# EAGLE board imix (EAGLE 7.5.0), part 1 of 2
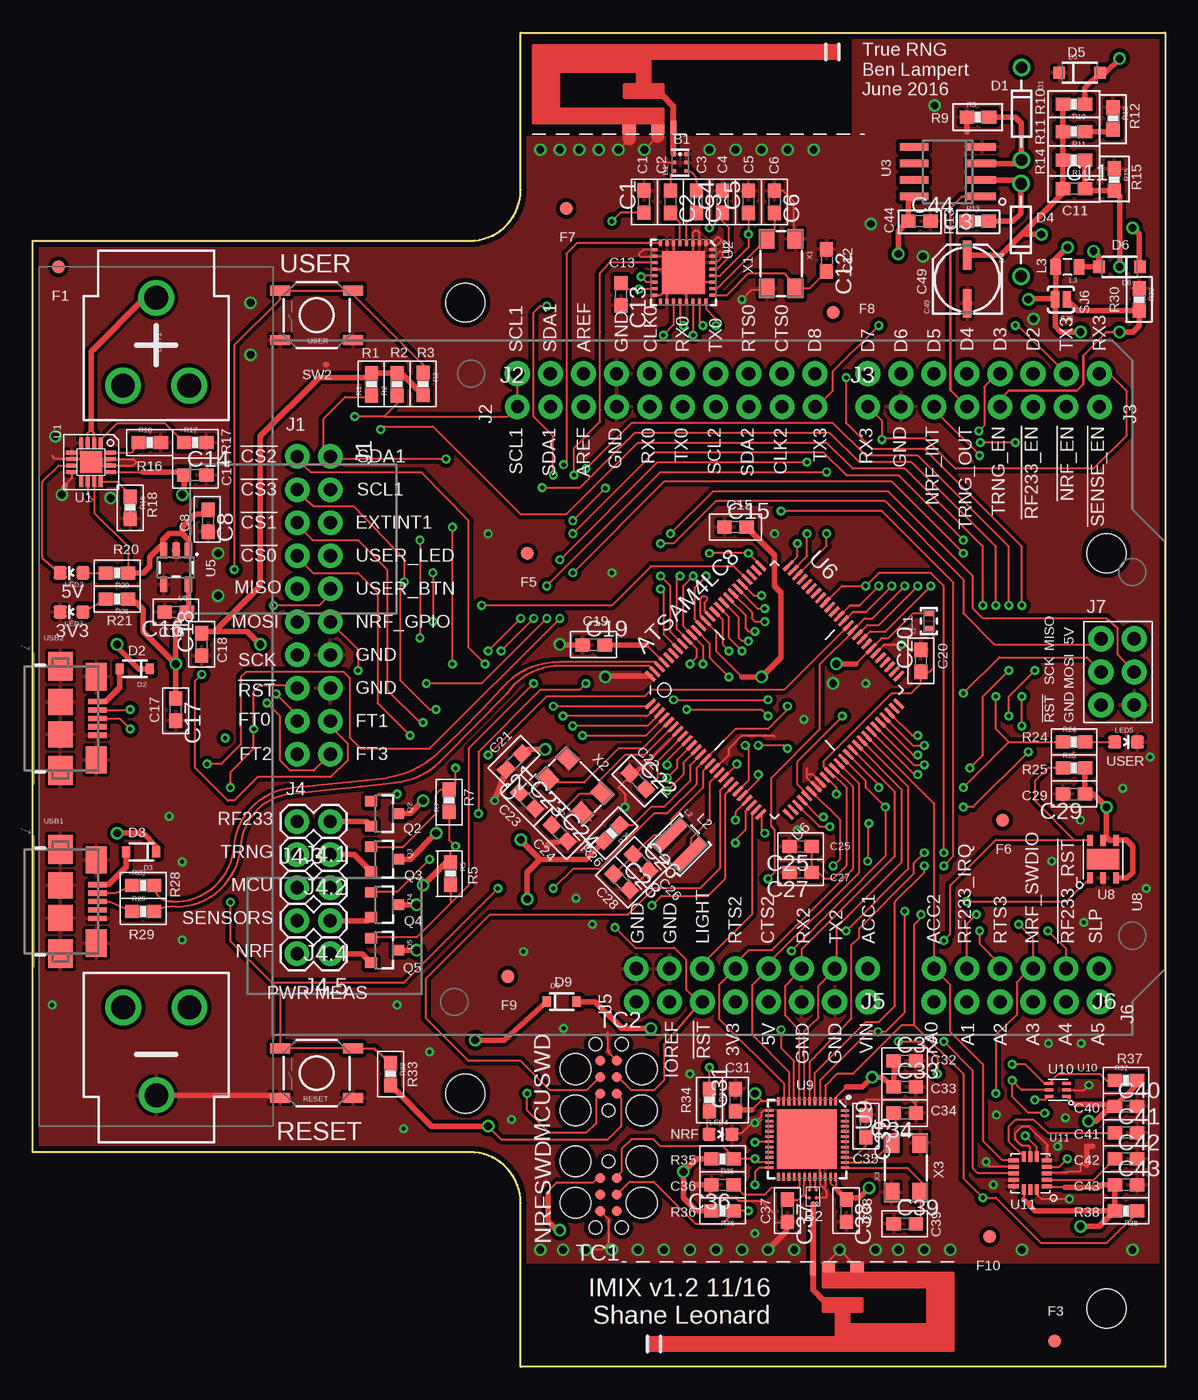
[diagram p0: board, top side]
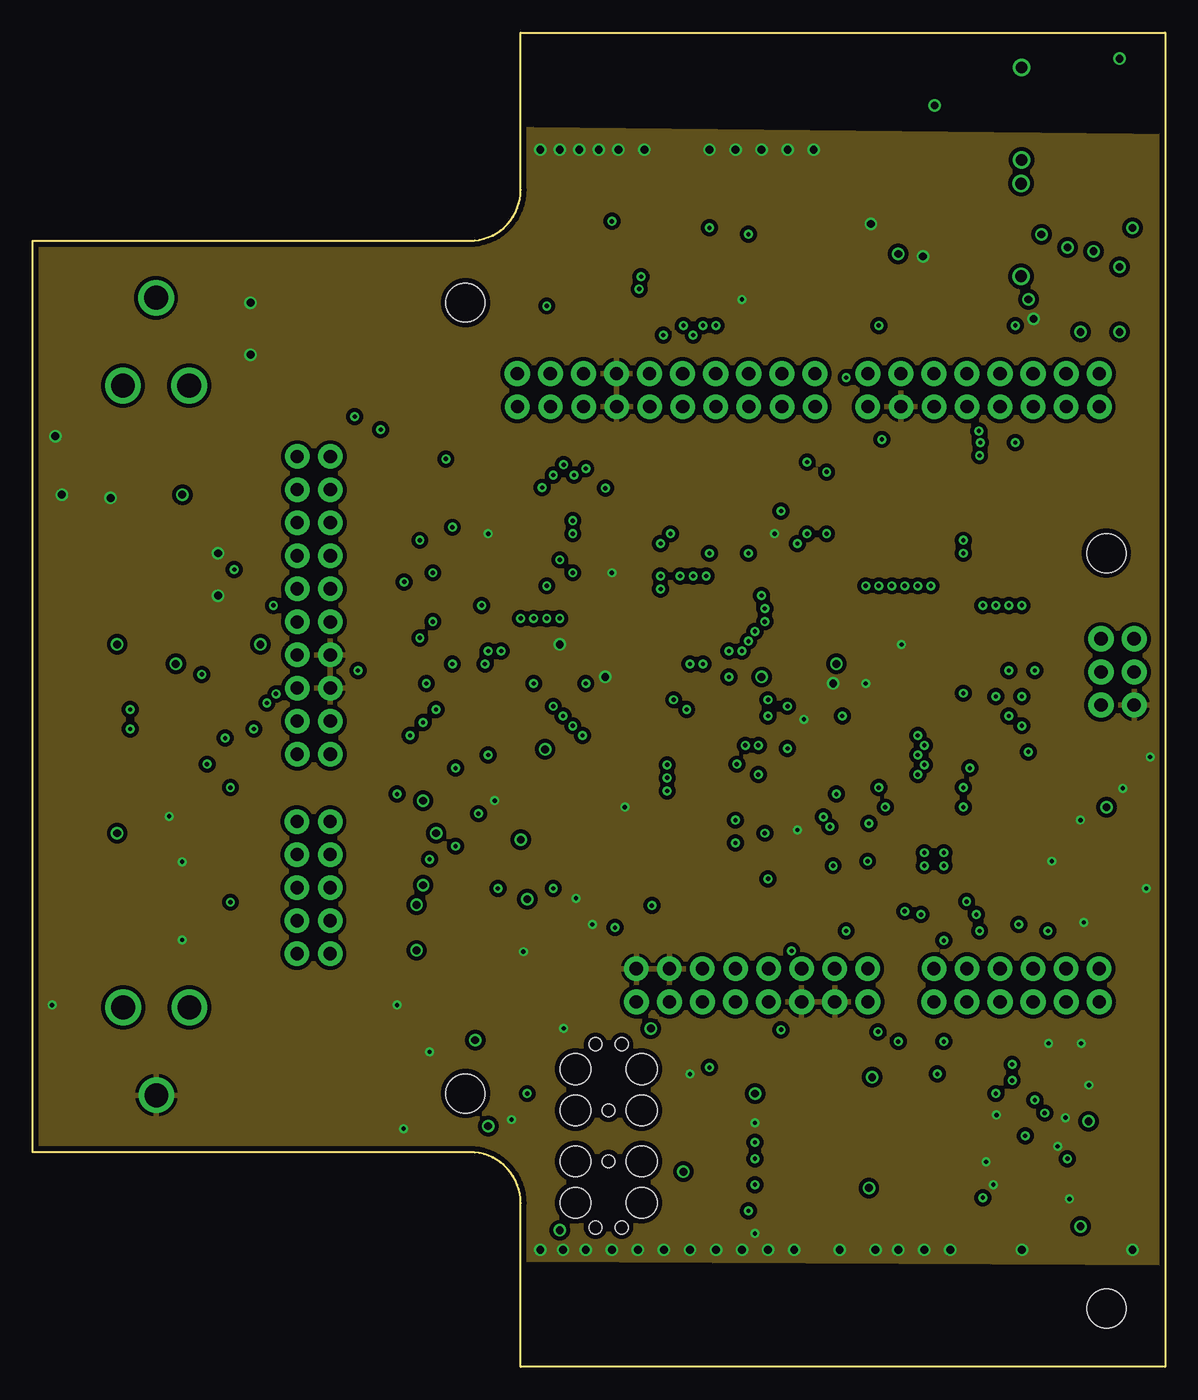
[diagram p1: board, inner layer Route2]
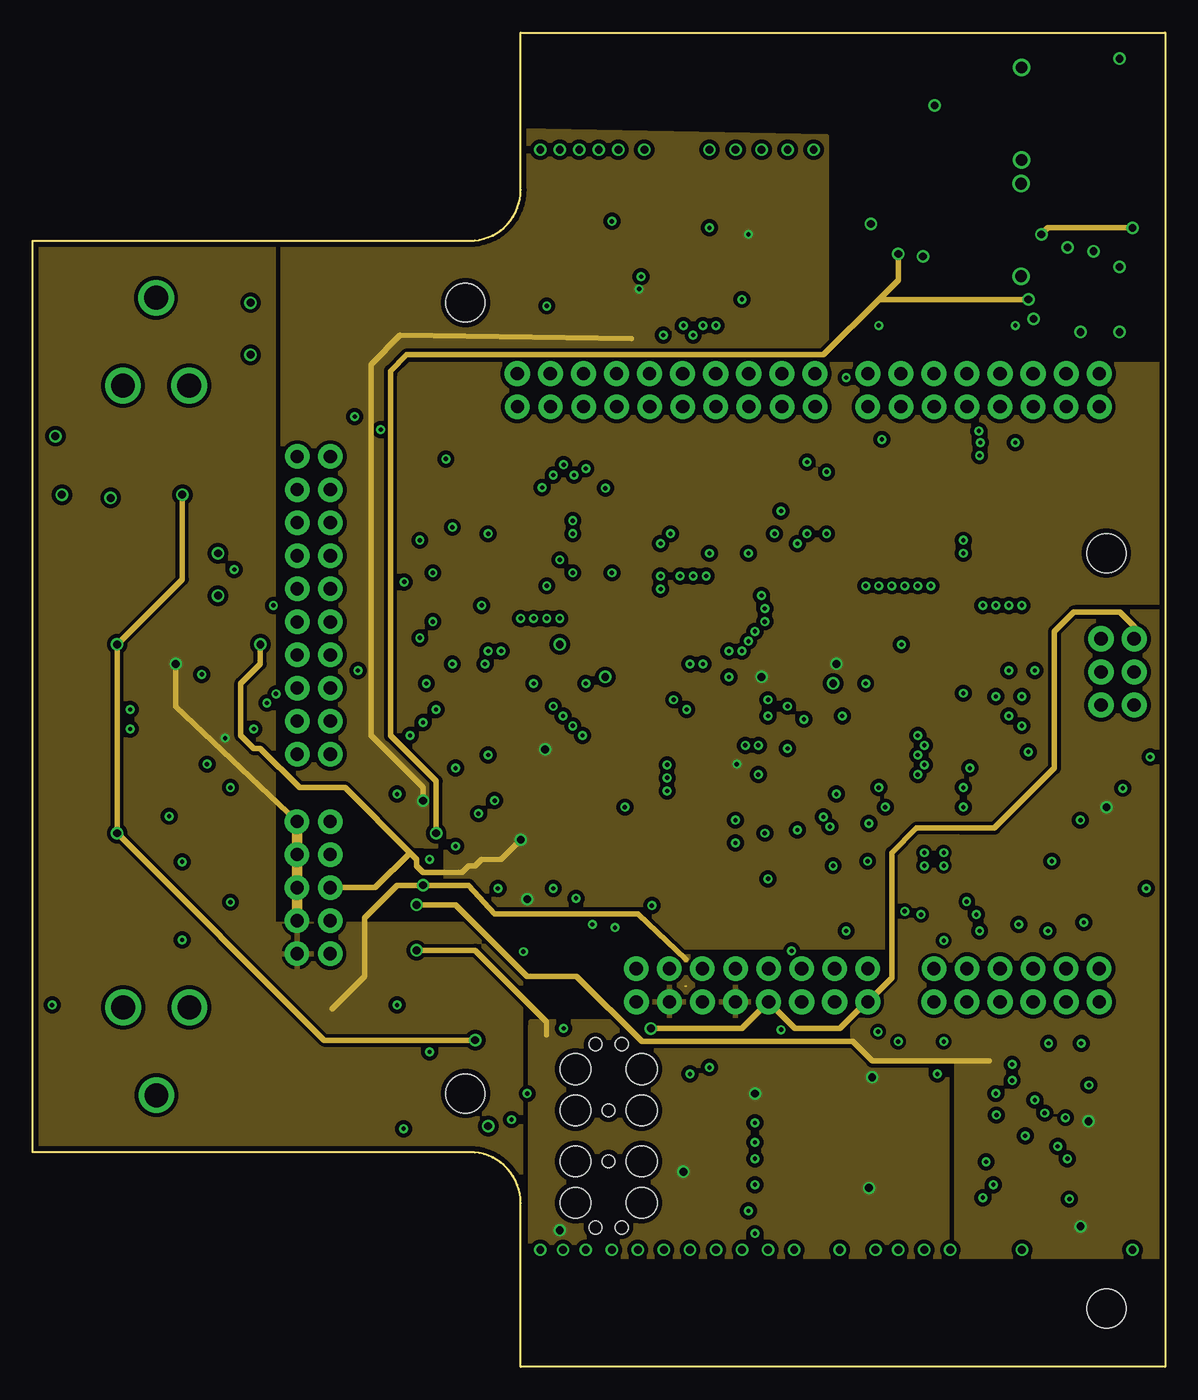
[diagram p2: board, inner layer Route15]
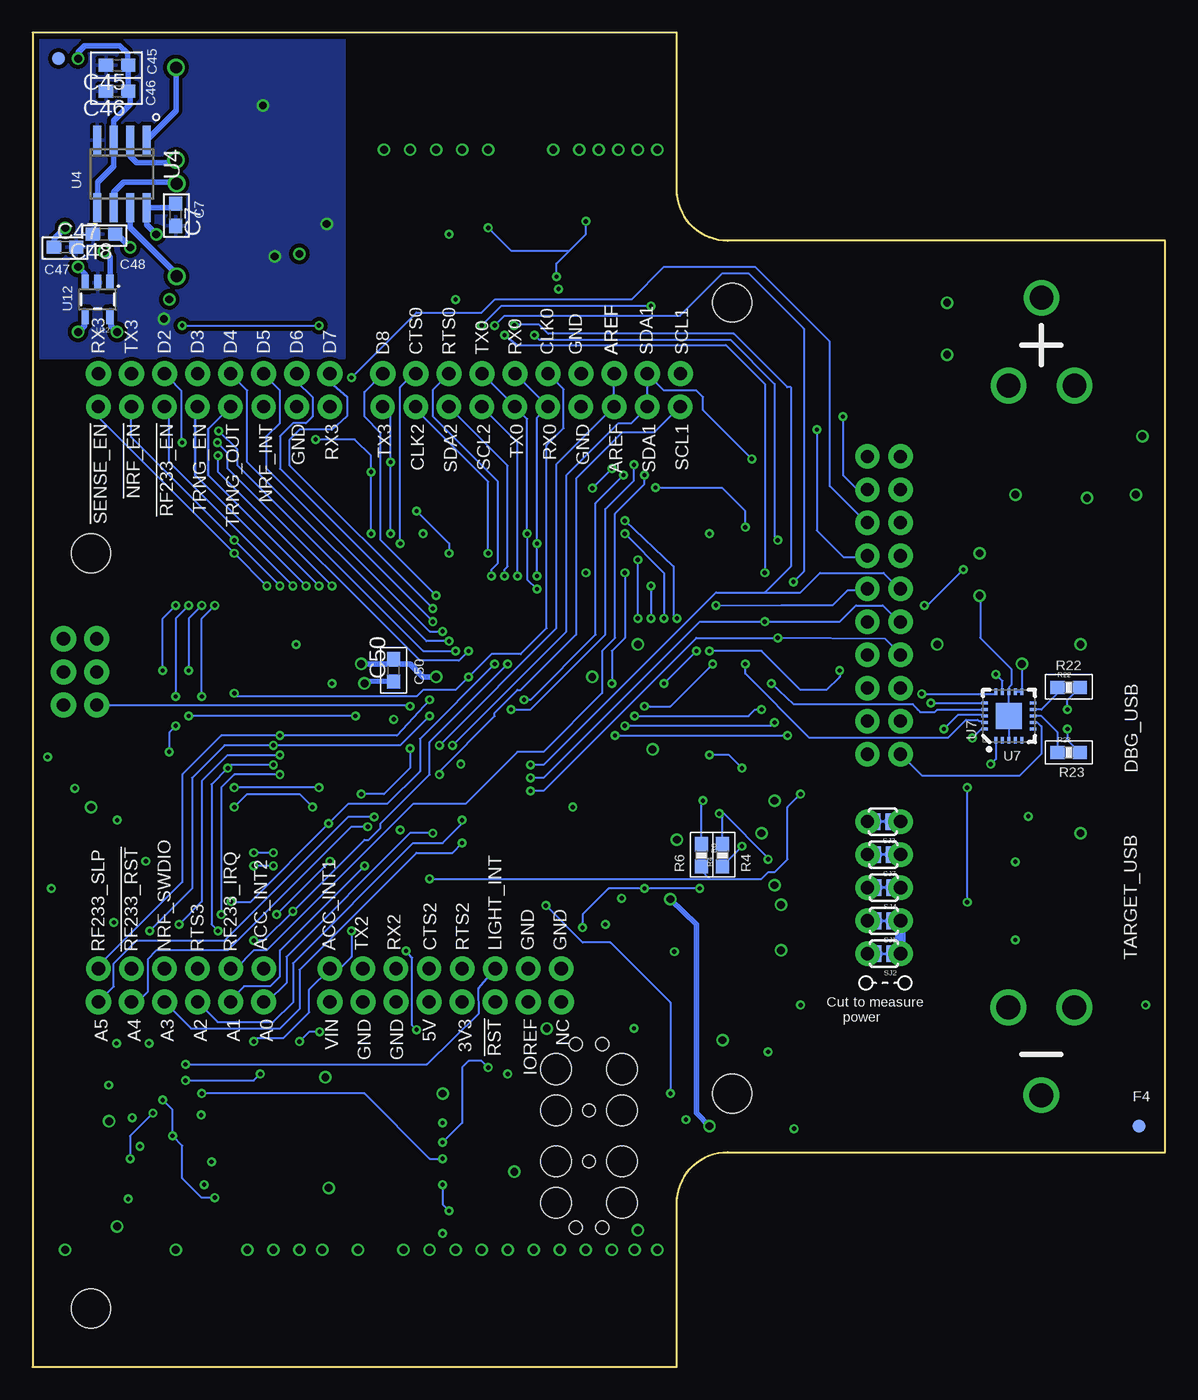
[diagram p3: board, bottom side, seen from below]

Size 87 x 102.5 mm. Coordinates in mm from the lower left corner, seen from the top.
Outline: 0,16.5 0,86.5 33.59,86.5 arc90 37.5,90.41 37.5,102.5 87,102.5 87,0 37.5,0 37.5,12.6 arc90 33.59,16.5 0,16.5
Copper layers (1+2*15+16): Top 0.0356mm / dielectric 9mil / Route2 0.0356mm / dielectric 40mil / Route15 0.0356mm / dielectric 9mil / Bottom 0.0356mm
Design rules "oshpark-2layer *": minimum track width 6mil, minimum drill 13mil, track to track 6mil, track to pad 6mil, pad to pad 6mil, via to via 6mil, smd to smd 6mil, copper to edge 15mil, drill to drill 6mil, minimum pad ring 7mil, minimum via ring 7mil, stop-mask expansion 2.5mil, vias tented up to drill 13mil, thermal gap 10mil
Net classes: 0 default: width 0.152 mm, drill 0.33 mm, clearance 0.152 mm; 1 power: width 0.152 mm, drill 0.33 mm, clearance 0.254 mm; 2 50ohm: width 0.152 mm, drill 0.33 mm, clearance 0.254 mm
Holes 3 mm at 33.25,81.75 33.25,21 82.5,4.5 82.5,62.5

## Footprints (pad centres in the part's own frame; a part is rotated, then mirrored left to right if it is on the bottom)
BALUN0805 = smd 0.3 x 0.3: 1 1.65,1.1; 2 1,1.1; 3 0.35,1.1; 4 0.35,0.15; 5 1,0.15; 6 1.65,0.15
BAL_NRF01D3 = smd 0.264 x 0.264: DIFF@1 0.219,0.25; DIFF@2 0.219,0.75; GND 0.819,0.75; SE 1.252,0.5; VCC 0.819,0.25
BATTERY_18650-HOLDER = drill 1.829: GND@1 30.628,0.01; GND@2 23.88,2.55; GND@3 23.88,-2.53; PWR@1 -30.628,-0.01; PWR@2 -23.88,2.53; PWR@3 -23.88,-2.55
C0603 = smd 1.1 x 1: 1 -0.85,0; 2 0.85,0
PANASONIC_C = smd 2.2 x 0.65: + 1.9,-0.2; - -1.8,-0.2
DIODE-ZENER = drill 0.9: P$1 -3.556,0; P$2 3.556,0
SOD-323 = smd 0.63 x 0.83: A 1.15,0; C -1.15,0
SOD-123 = smd 0.9 x 0.95: A 1.575,0; C -1.575,0
FIDUCIAL = smd 1 x 1: P$1 0,0
2X10_ROUND_NOSILK = drill 1.016 pad 1.88: 1 -11.43,-1.27; 2 -11.43,1.27; 3 -8.89,-1.27; 4 -8.89,1.27; 5 -6.35,-1.27; 6 -6.35,1.27; 7 -3.81,-1.27; 8 -3.81,1.27; 9 -1.27,-1.27; 10 -1.27,1.27; 11 1.27,-1.27; 12 1.27,1.27; 13 3.81,-1.27; 14 3.81,1.27; 15 6.35,-1.27; 16 6.35,1.27; 17 8.89,-1.27; 18 8.89,1.27; 19 11.43,-1.27; 20 11.43,1.27
1X10_NO_SILK = drill 1.016 pad 1.88: 1 0,0; 2 2.54,0; 3 5.08,0; 4 7.62,0; 5 10.16,0; 6 12.7,0; 7 15.24,0; 8 17.78,0; 9 20.32,0; 10 22.86,0
ARDUINO_R3_NO_HOLES = drill 1.016 pad 1.93: 3.3V 35.56,2.54; 5V 38.1,2.54; A0 50.8,2.54; A1 53.34,2.54; A2 55.88,2.54; A3 58.42,2.54; A4 60.96,2.54; A5 63.5,2.54; AREF 23.876,50.8; D0 63.5,50.8; D1 60.96,50.8; D2 58.42,50.8; D3 55.88,50.8; D4 53.34,50.8; D5 50.8,50.8; D6 48.26,50.8; D7 45.72,50.8; D8 41.656,50.8; D9 39.116,50.8; D10 36.576,50.8; D11 34.036,50.8; D12 31.496,50.8; D13 28.956,50.8; GND@1 40.64,2.54; GND@2 43.18,2.54; GND@3 26.416,50.8; GND@4 66.18,25.35; IOREF 30.48,2.54; MISO 63.64,30.43; MOSI 66.18,27.89; NC 27.94,2.54; RESET@1 33.02,2.54; RESET@2 63.64,25.35; SCK 63.64,27.89; SCL 18.796,50.8; SDA 21.336,50.8; VCC 66.18,30.43; VIN 45.72,2.54
1X08_NO_SILK = drill 1.016 pad 1.88: 1 0,0; 2 2.54,0; 3 5.08,0; 4 7.62,0; 5 10.16,0; 6 12.7,0; 7 15.24,0; 8 17.78,0
1X02 = drill 1.016 pad 1.88: 1 0,0; 2 2.54,0
1X06_NO_SILK = drill 1.016 pad 1.88: 1 0,0; 2 2.54,0; 3 5.08,0; 4 7.62,0; 5 10.16,0; 6 12.7,0
L0603 = smd 0.4 x 0.8: 1 0.2,0.4; 2 1.4,0.4
L1212 = smd 0.9 x 3: 1 -1.05,0; 2 1.05,0
0805 = smd 0.8 x 1.2: 1 -0.9,0; 2 0.9,0
LED-0603 = smd 1 x 1: A 0,-0.877; C 0,0.877
SOT23-3 = smd 0.8 x 0.9: 1 -0.95,-1; 2 0.95,-1; 3 0,1.1
0603-RES = smd 1.1 x 1: 1 -0.85,0; 2 0.85,0
TACTILE-SWITCH-SMD = smd 1.524 x 0.762: 1 -2.794,1.905; 2 2.794,1.905; 3 -2.794,-1.905; 4 2.794,-1.905
PAD-JUMPER-2-NC_BY_TRACE_YES_SILK = smd 0.635 x 1.27: 1 -0.508,0; 2 0.508,0
SJ_2S-NO = smd 0.635 x 1.27: 1 -0.45,0; 2 0.45,0
TC2030-IDC = smd 0.787 x 0.787: 1 -1.27,-0.635; 2 -1.27,0.635; 3 0,-0.635; 4 0,0.635; 5 1.27,-0.635; 6 1.27,0.635 | hole 0.991: -2.54,0; 2.54,1.016; 2.54,-1.016 | hole 2.375: -2.54,2.54; -2.54,-2.54; 0.635,2.54; 0.635,-2.54
QFP16_3X3 = smd 0.85 x 0.3: 1 -1.475,0.75; 2 -1.475,0.25; 3 -1.475,-0.25; 4 -1.475,-0.75; 9 1.475,-0.75; 10 1.475,-0.25; 11 1.475,0.25; 12 1.475,0.75 | smd 0.3 x 0.85: 5 -0.75,-1.475; 6 -0.25,-1.475; 7 0.25,-1.475; 8 0.75,-1.475; 13 0.75,1.475; 14 0.25,1.475; 15 -0.25,1.475; 16 -0.75,1.475 | smd 1.7 x 1.7: PAD 0,0
32QN2 = smd 0.5 x 0.23: 1 -2.25,1.75; 2 -2.25,1.25; 3 -2.25,0.75; 4 -2.25,0.25; 5 -2.25,-0.25; 6 -2.25,-0.75; 7 -2.25,-1.25; 8 -2.25,-1.75; 17 2.25,-1.75; 18 2.25,-1.25; 19 2.25,-0.75; 20 2.25,-0.25; 21 2.25,0.25; 22 2.25,0.75; 23 2.25,1.25; 24 2.25,1.75 | smd 0.23 x 0.5: 9 -1.75,-2.25; 10 -1.25,-2.25; 11 -0.75,-2.25; 12 -0.25,-2.25; 13 0.25,-2.25; 14 0.75,-2.25; 15 1.25,-2.25; 16 1.75,-2.25; 25 1.75,2.25; 26 1.25,2.25; 27 0.75,2.25; 28 0.25,2.25; 29 -0.25,2.25; 30 -0.75,2.25; 31 -1.25,2.25; 32 -1.75,2.25 | smd 3.3 x 3.3: PADDLE 0,0
SO8 = smd 0.6 x 2.2: 1 -1.905,-2.6; 2 -0.635,-2.6; 3 0.635,-2.6; 4 1.905,-2.6; 5 1.905,2.6; 6 0.635,2.6; 7 -0.635,2.6; 8 -1.905,2.6
SOT23-5 = smd 0.55 x 1.2: 1 -0.95,-1.3; 2 0,-1.3; 3 0.95,-1.3; 4 0.95,1.3; 5 -0.95,1.3
TQFP100 = smd 1 x 0.25: 1 -7.5,6; 2 -7.5,5.5; 3 -7.5,5; 4 -7.5,4.5; 5 -7.5,4; 6 -7.5,3.5; 7 -7.5,3; 8 -7.5,2.5; 9 -7.5,2; 10 -7.5,1.5; 11 -7.5,1; 12 -7.5,0.5; 13 -7.5,0; 14 -7.5,-0.5; 15 -7.5,-1; 16 -7.5,-1.5; 17 -7.5,-2; 18 -7.5,-2.5; 19 -7.5,-3; 20 -7.5,-3.5; 21 -7.5,-4; 22 -7.5,-4.5; 23 -7.5,-5; 24 -7.5,-5.5; 25 -7.5,-6; 51 7.5,-6; 52 7.5,-5.5; 53 7.5,-5; 54 7.5,-4.5; 55 7.5,-4; 56 7.5,-3.5; 57 7.5,-3; 58 7.5,-2.5; 59 7.5,-2; 60 7.5,-1.5; 61 7.5,-1; 62 7.5,-0.5; 63 7.5,0; 64 7.5,0.5; 65 7.5,1; 66 7.5,1.5; 67 7.5,2; 68 7.5,2.5; 69 7.5,3; 70 7.5,3.5; 71 7.5,4; 72 7.5,4.5; 73 7.5,5; 74 7.5,5.5; 75 7.5,6 | smd 0.25 x 1: 26 -6,-7.5; 27 -5.5,-7.5; 28 -5,-7.5; 29 -4.5,-7.5; 30 -4,-7.5; 31 -3.5,-7.5; 32 -3,-7.5; 33 -2.5,-7.5; 34 -2,-7.5; 35 -1.5,-7.5; 36 -1,-7.5; 37 -0.5,-7.5; 38 0,-7.5; 39 0.5,-7.5; 40 1,-7.5; 41 1.5,-7.5; 42 2,-7.5; 43 2.5,-7.5; 44 3,-7.5; 45 3.5,-7.5; 46 4,-7.5; 47 4.5,-7.5; 48 5,-7.5; 49 5.5,-7.5; 50 6,-7.5; 76 6,7.5; 77 5.5,7.5; 78 5,7.5; 79 4.5,7.5; 80 4,7.5; 81 3.5,7.5; 82 3,7.5; 83 2.5,7.5; 84 2,7.5; 85 1.5,7.5; 86 1,7.5; 87 0.5,7.5; 88 0,7.5; 89 -0.5,7.5; 90 -1,7.5; 91 -1.5,7.5; 92 -2,7.5; 93 -2.5,7.5; 94 -3,7.5; 95 -3.5,7.5; 96 -4,7.5; 97 -4.5,7.5; 98 -5,7.5; 99 -5.5,7.5; 100 -6,7.5
QFN20 = smd 0.5 x 0.25: 1 -1.85,1; 2 -1.85,0.5; 3 -1.85,0; 4 -1.85,-0.5; 5 -1.85,-1; 11 1.85,-1; 12 1.85,-0.5; 13 1.85,0; 14 1.85,0.5; 15 1.85,1 | smd 0.25 x 0.5: 6 -1,-1.85; 7 -0.5,-1.85; 8 0,-1.85; 9 0.5,-1.85; 10 1,-1.85; 16 1,1.85; 17 0.5,1.85; 18 0,1.85; 19 -0.5,1.85; 20 -1,1.85 | smd 2 x 2: PADDLE 0,0
SI7021 = smd 0.85 x 0.45: 1 -1.45,1; 2 -1.45,0; 3 -1.45,-1; 4 1.45,-1; 5 1.45,0; 6 1.45,1 | smd 1.6 x 2.5: P$7 0,0
QFN48_6X6 = smd 0.6 x 0.2: 1 -2.9,2.2; 2 -2.9,1.8; 3 -2.9,1.4; 4 -2.9,1; 5 -2.9,0.6; 6 -2.9,0.2; 7 -2.9,-0.2; 8 -2.9,-0.6; 9 -2.9,-1; 10 -2.9,-1.4; 11 -2.9,-1.8; 12 -2.9,-2.2; 25 2.9,-2.2; 26 2.9,-1.8; 27 2.9,-1.4; 28 2.9,-1; 29 2.9,-0.6; 30 2.9,-0.2; 31 2.9,0.2; 32 2.9,0.6; 33 2.9,1; 34 2.9,1.4; 35 2.9,1.8; 36 2.9,2.2 | smd 0.2 x 0.6: 13 -2.2,-2.9; 14 -1.8,-2.9; 15 -1.4,-2.9; 16 -1,-2.9; 17 -0.6,-2.9; 18 -0.2,-2.9; 19 0.2,-2.9; 20 0.6,-2.9; 21 1,-2.9; 22 1.4,-2.9; 23 1.8,-2.9; 24 2.2,-2.9; 37 2.2,2.9; 38 1.8,2.9; 39 1.4,2.9; 40 1,2.9; 41 0.6,2.9; 42 0.2,2.9; 43 -0.2,2.9; 44 -0.6,2.9; 45 -1,2.9; 46 -1.4,2.9; 47 -1.8,2.9; 48 -2.2,2.9 | smd 4.6 x 4.6: PADDLE 0,0
ISL29035 = smd 0.65 x 0.25: 1 -0.675,0.5; 2 -0.675,0; 3 -0.675,-0.5; 4 0.675,-0.5; 5 0.675,0; 6 0.675,0.5
QFN16_3,5 = smd 0.8 x 0.3: 1 -1.275,1; 2 -1.275,0.5; 3 -1.275,0; 4 -1.275,-0.5; 5 -1.275,-1; 9 1.275,-1; 10 1.275,-0.5; 11 1.275,0; 12 1.275,0.5; 13 1.275,1 | smd 0.3 x 0.8: 6 -0.5,-1.275; 7 0,-1.275; 8 0.5,-1.275; 14 0.5,1.275; 15 0,1.275; 16 -0.5,1.275
DN007-2 = smd 0.46 x 1: FEED 2.22,-2.8 | smd 1.01 x 0.74: GND -1.16,-2.93; GND@1 1.035,-2.93
USB-AB-MICRO-SMD = smd 1.4 x 0.4: D+ 2.85,0; D- 2.85,0.65; GND 2.85,-1.3; ID 2.85,-0.65; VBUS 2.85,1.3 | smd 1.9 x 2.2: SHIELD1 0,4; SHIELD4 0,-4 | smd 1.9 x 2: SHIELD2 0,1.25; SHIELD3 0,-1.25 | smd 1.6 x 2.1: SHIELD5 2.75,3.2; SHIELD6 2.75,-3.2
CTS_405_SERIES = smd 1.5 x 1.2: 1 -1.9,-1.1; 3 1.9,1.1; CASE@2 -1.9,1.1; CASE@4 1.9,-1.1

## Placement (x,y rotation side)
B1  2450BM15A0015  [BALUN0805]  50.37,91.52 90 top
B2  BAL_NRF01D3  [BAL_NRF01D3]  59.45,13.82 270 top
BAT1  [BATTERY_18650-HOLDER]  9.5,51.5 270 top
C1  100nF  [C0603]  46.97,89.51 90 top
C2  22pF  [C0603]  49,89.5 270 top
C3  22pF  [C0603]  51,89.5 270 top
C4  100nF  [C0603]  53,89.5 90 top
C5  1uF  [C0603]  55,89.5 90 top
C6  13pF  [C0603]  57,89.5 270 top
C7  0.47uF  [C0603]  76,88.5 270 bottom
C8  4.7uF  [C0603]  13.5,65 270 top
C11  22pF  [C0603]  80,90.5 0 top
C12  13pF  [C0603]  61,85 270 top
C13  1uF  [C0603]  45.2,82.4 270 top
C14  1uF  [C0603]  12.5,68.5 0 top
C15  100nF  [C0603]  54,64.5 0 top
C16  1uF  [C0603]  11,58 180 top
C17  100nF  [C0603]  11,50.5 270 top
C18  10uF  [C0603]  13,55.5 90 top
C19  100nF  [C0603]  43.1,55.47 0 top
C20  100nF  [C0603]  68.25,54.25 90 top
C21  100nF  [C0603]  37,46.5 225 top
C22  100nF  [C0603]  46.5,45 315 top
C23  13pF  [C0603]  38,43.5 315 top
C24  13pF  [C0603]  40.5,41 315 top
C25  4.7uF  [C0603]  59,40 180 top
C26  6.8uF  [C0603]  46.75,38.75 315 top
C27  100nF  [C0603]  59,38 180 top
C28  100nF  [C0603]  45.25,37.25 315 top
C29  100nF  [C0603]  80,44 180 top
C31  100 nF  [C0603]  54,20.5 90 top
C32  100 nF  [C0603]  67,23.5 0 top
C33  100nF  [C0603]  67,21.5 0 top
C34  13pF  [C0603]  67,19.5 180 top
C35  1 nF  [C0603]  64,18.5 270 top
C36  47 nF  [C0603]  53,14 180 top
C37  2.2 nF  [C0603]  58,12 270 top
C38  1 nF  [C0603]  62.5,12 270 top
C39  13pF  [C0603]  67,11 0 top
C40  100nF  [C0603]  84,20 0 top
C41  100nF  [C0603]  84,18 0 top
C42  100nF  [C0603]  84,16 0 top
C43  100nF  [C0603]  84,14 0 top
C44  0.47uF  [C0603]  68.12,88.01 0 top
C45  DNP  [C0603]  80.5,100 180 bottom
C46  0.47uF  [C0603]  80.5,98 180 bottom
C47  0.47uF  [C0603]  84.5,86 0 bottom
C48  4.7uF  [C0603]  81.5,87 180 bottom
C49  10uF  [PANASONIC_C]  71.6,83.5 90 top
C50  100nF  [C0603]  59.25,53.5 90 bottom
D1  DIODE-ZENERPTH  [DIODE-ZENER]  75.97,96.27 270 top
D2  NSR1020MW2T3G  [SOD-323]  7.86,53.63 180 top
D3  NSR1020MW2T3G  [SOD-323]  8.36,39.56 180 top
D4  DIODE-ZENERPTH  [DIODE-ZENER]  75.93,87.34 90 top
D5  MBR0530  [SOD-123]  80.44,99.42 0 top
D6  MBR0530  [SOD-123]  83.5,84.5 180 top
D9  NSR1020MW2T3G  [SOD-323]  40.65,28.06 0 top
F1  FIDUCIAL  [FIDUCIAL]  2,84.5 0 top
F2  FIDUCIAL  [FIDUCIAL]  85,100.5 0 bottom
F3  FIDUCIAL  [FIDUCIAL]  78.5,2 0 top
F4  FIDUCIAL  [FIDUCIAL]  2,18.5 0 bottom
F5  FIDUCIAL  [FIDUCIAL]  38,62.5 0 top
F6  FIDUCIAL  [FIDUCIAL]  74.5,42 0 top
F7  FIDUCIAL  [FIDUCIAL]  41,89 0 top
F8  FIDUCIAL  [FIDUCIAL]  61.5,81 0 top
F9  FIDUCIAL  [FIDUCIAL]  36.5,30 0 top
F10  FIDUCIAL  [FIDUCIAL]  73.5,10 0 top
J1  [2X10_ROUND_NOSILK]  21.6,58.5 270 top
J2  [1X10_NO_SILK]  37.25,73.76 0 top
J2_3_5_AND_6  ARDUINO_R3NO_HOLES  [ARDUINO_R3_NO_HOLES]  18.44,25.5 0 top
J3  [1X08_NO_SILK]  64.17,73.76 0 top
J4.1  [1X02]  22.86,41.9 180 top
J4.2  [1X02]  22.86,39.36 180 top
J4.3  [1X02]  20.32,36.82 0 top
J4.4  [1X02]  22.86,34.28 180 top
J4.5  [1X02]  22.86,31.74 180 top
J5  [1X08_NO_SILK]  64.16,30.59 180 top
J6  [1X06_NO_SILK]  81.94,30.59 180 top
L1  BLM18HE152SN1  [L0603]  69.25,56.5 90 top
L2  22uH LQH3NPN220MJ0  [L1212]  49.72,40.11 315 top
L3  10uH  [0805]  79.5,84.5 180 top
LED2  5V  [LED-0603]  3,61 90 top
LED3  3.3V  [LED-0603]  3,58 90 top
LED4  NRF  [LED-0603]  52.85,17.88 270 top
LED5  USER  [LED-0603]  84,48 270 top
Q2  AO3415  [SOT23-3]  27,42.5 270 top
Q3  AO3415  [SOT23-3]  27,39 270 top
Q4  AO3415  [SOT23-3]  27,35.5 270 top
Q5  AO3415  [SOT23-3]  27,32 270 top
R1  4.7K  [0603-RES]  26.03,75.49 90 top
R2  4.7K  [0603-RES]  27.99,75.49 90 top
R3  100K  [0603-RES]  30,75.5 270 top
R4  10K  [0603-RES]  34,39.3 90 bottom
R5  10K  [0603-RES]  32.1,37.9 270 top
R6  10K  [0603-RES]  35.62,39.3 270 bottom
R7  10K  [0603-RES]  32,43.5 90 top
R9  10K  [0603-RES]  72.63,96 0 top
R10  10K  [0603-RES]  80,97 180 top
R11  DNP  [0603-RES]  80,94.9 180 top
R12  DNP  [0603-RES]  83,95.9 270 top
R13  10K  [0603-RES]  72.6,88 0 top
R14  2.2M  [0603-RES]  80,92.7 180 top
R15  160K  [0603-RES]  83.1,91.2 270 top
R16  10K  [0603-RES]  9,71 0 top
R17  10K  [0603-RES]  12.5,71 0 top
R18  DNP  [0603-RES]  7.5,66 270 top
R20  1K  [0603-RES]  6.5,61 180 top
R21  1K  [0603-RES]  6.5,59 180 top
R22  27  [0603-RES]  7.4,52.2 0 bottom
R23  27  [0603-RES]  7.4,47.2 0 bottom
R24  1K  [0603-RES]  80,48 0 top
R25  4.7K  [0603-RES]  80,46 0 top
R26  10K  [0603-RES]  44.5,41 225 top
R28  27  [0603-RES]  8.5,37 0 top
R29  27  [0603-RES]  8.5,35 0 top
R30  10K  [0603-RES]  85,82 270 top
R33  100K  [0603-RES]  27.5,22.5 270 top
R34  1K  [0603-RES]  52,20.5 270 top
R35  10K  [0603-RES]  53,16 180 top
R36  10K  [0603-RES]  53,12 180 top
R37  4.7K  [0603-RES]  84,22 0 top
R38  4.7K  [0603-RES]  84,12 180 top
RESET  [TACTILE-SWITCH-SMD]  21.82,22.57 180 top
SJ1  [PAD-JUMPER-2-NC_BY_TRACE_YES_SILK]  21.6,34.26 180 bottom
SJ2  [PAD-JUMPER-2-NC_BY_TRACE_YES_SILK]  21.59,31.74 180 bottom
SJ3  [PAD-JUMPER-2-NC_BY_TRACE_YES_SILK]  21.68,41.89 180 bottom
SJ4  [PAD-JUMPER-2-NC_BY_TRACE_YES_SILK]  21.61,36.82 180 bottom
SJ6  SOLDERJUMPERNO  [SJ_2S-NO]  79,82 180 top
SJ7  [PAD-JUMPER-2-NC_BY_TRACE_YES_SILK]  21.65,39.35 180 bottom
TC1  TC2030-IDC  [TC2030-IDC]  44.25,13.25 270 top
TC2  TC2030-IDC  [TC2030-IDC]  44.25,22.25 90 top
U1  BQ2423X  [QFP16_3X3]  4.5,69.5 270 top
U2  [32QN2]  50,84.07 270 top
U3  TLV3202  [SO8]  70.31,91.81 90 top
U4  LM358  [SO8]  80.14,91.64 180 bottom
U5  LDO-TPS78233  [SOT23-5]  11.03,61.41 180 top
U6  ATSAM4LCX_100  [TQFP100]  57,52 45 top
U7  [QFN20]  12,50 90 bottom
U8  SI7021  [SI7021]  82.23,39 90 top
U9  NRF51422  [QFN48_6X6]  59.5,17.5 270 top
U10  ISL29035  [ISL29035]  78.77,21.28 180 top
U11  FX0S8700CQ  [QFN16_3,5]  76.64,14.88 180 top
U12  296-12686-1-ND  [SOT23-5]  82,82 180 bottom
U$1  INVERTED_F_ANTENNA-2  [DN007-2]  47,98 0 top
U$4  INVERTED_F_ANTENNA-2  [DN007-2]  62.18,4.76 180 top
USB1  [USB-AB-MICRO-SMD]  2.14,35.75 0 top
USB2  [USB-AB-MICRO-SMD]  2.14,49.82 0 top
USER  [TACTILE-SWITCH-SMD]  21.82,80.78 180 top
X1  16MHz  [CTS_405_SERIES]  57.5,84.75 270 top
X2  16MHz  [CTS_405_SERIES]  41.66,44.64 135 top
X3  16MHz  [CTS_405_SERIES]  67.09,15.3 90 top

## Library data of the parts
B1 B2 L1 L2 U2 U7 X1-X3 = stanford_iot_research
BAT1 = imix_v1
C1-C8 C11-C16 C18-C29 C31-C50 J2_3_5_AND_6 R1-R7 R9-R18 R20-R26 R28-R30 R33-R38 U1 U6 U8-U11 = imix
C17 = rcl
D1 D4 = SparkFun-DiscreteSemi; MPN: 610-1N759A
D2 D3 D9 = SparkFun-DiscreteSemi; PROD_ID: DIO-11623
D5 = SparkFun-DiscreteSemi; DKPN: MBR0530CT-ND; PROD_ID: DIO-12440
D6 = imix_v1; DKPN: MBR0530CT-ND
F1-F10 = GeekAmmo
J1 J4.1-J4.5 = SparkFun-Connectors
J2 = SparkFun-Connectors; PROD_ID: CONN-11563
J3 J5 = SparkFun-Connectors; PROD_ID: CONN-08438
J6 = SparkFun-Connectors; PROD_ID: CONN-08437
L3 = SparkFun-Passives; DKPN: 587-2045-1-ND; MFPN: LBR2012T100K
LED2 LED4 LED5 = SparkFun-LED; PROD_ID: DIO-08575
LED3 = SparkFun-LED; PROD_ID: DIO-00821
Q2-Q5 = SparkFun-DiscreteSemi; PROD_ID: TRANS-11308
RESET USER = SparkFun-Retired; PROD_ID: SWCH-08247
SJ1-SJ4 SJ7 = SparkFun-Passives
SJ6 = SparkFun-Retired
TC1 TC2 = TagConnect
U3 = analog-devices; DKPN: 296-34773-1-ND; MF: ALTERA CORPORATION; MPN: AD712KRZ; OC_FARNELL: 1263975; OC_NEWARK: 59K4556
U4 = analog-devices; MF: ALTERA CORPORATION; MPN: AD712KRZ; OC_FARNELL: 1263975; OC_NEWARK: 59K4556
U5 = SparkFun-PowerIC
U12 = SparkFun-PowerIC; DKPN: 296-12686-1-ND
U$1 U$4 = inverted_f_antenna
USB1 USB2 = SparkFun-Connectors-Fixed

## Nets
!NRF_PWR_EN: J3.7 Q5.1 R5.2 U6.60
!RESET: J1.15 J2_3_5_AND_6.RESET@1 J2_3_5_AND_6.RESET@2 R33.1 RESET.3 RESET.4 TC2.3 U6.13 U7.18
!RF233_PWR_EN: J3.6 Q2.1 R6.2 U6.61
!SENSE_PWR_EN: J3.8 Q4.1 R4.2 U6.59
!TRNG_PWR_EN: Q3.1 R7.2 U6.62
ACC_INT1: J5.1 U6.42 U11.11
ACC_INT2: J6.6 U6.43 U11.9
ADCIFE0: J2_3_5_AND_6.A0 U6.25
ADCIFE1: J2_3_5_AND_6.A1 U6.31
ADCIFE2: J2_3_5_AND_6.A2 U6.22
ADCIFE3: J2_3_5_AND_6.A3 U6.23
ADCIFE4: J2_3_5_AND_6.A4 U6.28
ADCIFE5: J2_3_5_AND_6.A5 U6.29
AREF: J2.3 J2_3_5_AND_6.AREF U6.34
BIASH: U6.54
BIASL: U6.55
BUCK/BOOST: R26.1 U6.12
EXTINT1: J1.6 U6.30
FTDI0 [50ohm]: J1.17 U7.15
FTDI1 [50ohm]: J1.18 U7.14
FTDI2 [50ohm]: J1.19 U7.7
FTDI3 [50ohm]: J1.20 U7.16
GND: B1.2 B1.5 B1.6 B2.GND BAT1.GND@1 C1.2 C4.2 C5.2 C6.1 C7.2 C8.2 C12.1 C13.2 C14.2 C15.1 C16.2 C17.2 C18.1 C19.1 C20.2 C21.2 C22.1 C23.2 C24.2 C25.2 C26.2 C27.2 C28.2 C29.2 C31.2 C32.2 C33.2 C34.1 C35.1 C36.2 C37.2 C38.2 C39.1 C40.2 C41.2 C42.2 C43.2 C44.2 C45.2 C46.2 C47.2 C48.2 C49.- C50.1 D5.C J1.14 J1.16 J2.4 J2_3_5_AND_6.GND@1 J2_3_5_AND_6.GND@2 J2_3_5_AND_6.GND@3 J2_3_5_AND_6.GND@4 J3.2 J5.7 J5.8 LED3.C LED4.C LED5.C R6.1 R9.1 R12.1 R13.1 R15.1 R16.2 R17.2 R18.2 R30.1 RESET.1 RESET.2 TC1.5 TC2.5 U1.4 U1.5 U1.6 U1.8 U1.14 U1.15 U1.PAD U2.1 U2.2 U2.3 U2.6 U2.7 U2.9 U2.10 U2.12 U2.16 U2.18 U2.21 U2.27 U2.30 U2.31 U2.32 U2.PADDLE U3.4 U4.4 U5.2 U5.4 U6.7 U6.15 U6.32 U6.33 U6.56 U6.100 U7.3 U7.13 U7.PADDLE U8.2 U9.13 U9.33 U9.34 U9.PADDLE U10.2 U11.3 U11.5 U11.7 U11.10 U11.12 U11.13 U11.16 U12.2 U$1.GND U$1.GND@1 U$4.GND U$4.GND@1 USB1.GND USB1.SHIELD1 USB1.SHIELD2 USB1.SHIELD3 USB1.SHIELD4 USB1.SHIELD5 USB1.SHIELD6 USB2.GND USB2.SHIELD1 USB2.SHIELD2 USB2.SHIELD3 USB2.SHIELD4 USB2.SHIELD5 USB2.SHIELD6 USER.1 USER.2 X1.CASE@2 X1.CASE@4 X2.CASE@2 X2.CASE@4 X3.CASE@2 X3.CASE@4
GPIO2: J2_3_5_AND_6.D2 U6.86
GPIO3: J2_3_5_AND_6.D3 U6.85
GPIO4: J2_3_5_AND_6.D4 U6.84
GPIO5: J2_3_5_AND_6.D5 U6.83
GPIO6: J2_3_5_AND_6.D6 U6.82
GPIO7: J2_3_5_AND_6.D7 U6.81
GPIO8: J2_3_5_AND_6.D8 U6.80
LIGHT_!INT: J5.6 R37.1 U6.24 U10.4
MCU_VOUT3.3: L2.2 U6.16
MISO: J1.9 U2.20 U6.9
MOSI: J1.11 U2.22 U6.10
N$1 [50ohm]: C2.2 U2.5
N$2: C1.1 C4.1 U2.13 U2.14 U2.29
N$3: R28.1 USB1.D-
N$4: C6.2 U2.26 X1.1
N$5 [50ohm]: B2.SE U$4.FEED
N$6: B2.VCC C37.1 U9.30
N$7: C34.2 U9.38 X3.3
N$9: C39.2 U9.37 X3.1
N$10: C20.1 C25.1 C27.1 L1.1 U6.35
N$11: C24.1 U6.6 X2.1
N$12: C26.1 C28.1 L2.1 U6.14
N$13: C23.1 U6.5 X2.3
N$14 [power]: J4.2.1 Q3.2 SJ7.2
N$15: C35.2 U9.39
N$17 [50ohm]: C3.2 U2.4
N$18 [power]: J4.4.1 Q4.2 SJ1.2
N$19: C36.1 U9.29
N$20: R22.2 USB2.D-
N$21 [50ohm]: B2.DIFF@1 U9.31
N$22 [50ohm]: B1.3 C2.1
N$23 [50ohm]: B2.DIFF@2 U9.32
N$24: R22.1 U7.9
N$26: R23.2 USB2.D+
N$29: LED5.A R24.2
N$30: R23.1 U7.8
N$34: R29.1 USB1.D+
N$36 [power]: J4.5.1 Q5.2 SJ2.2
N$37 [power]: J4.1.1 Q2.2 SJ3.2
N$38: LED3.A R21.2
N$40: C12.2 U2.25 X1.3
N$41 [50ohm]: B1.4 C3.1
N$42 [50ohm]: B1.1 U$1.FEED
N$43: D6.A L3.1 U12.1
N$46: C11.2 R14.1 R15.2 U12.3
N$47: LED2.C U1.7
N$49: LED2.A R20.2
N$51: D1.P$1 U4.1
N$52: D4.P$1 U4.7
N$53: R17.1 U1.1
N$57: R18.1 U1.12
N$58: R16.1 U1.16
N$61: C41.1 U11.8
N$62: C42.1 U11.2
N$66: C45.1 C46.1 D5.A R10.1 U4.3 U4.5
N$75: LED4.A R34.2
NOISE1: D1.P$2 R9.2 U3.3 U4.2
NOISE2: D4.P$2 R13.2 U3.2 U4.6
NRF_GPIO: J1.12 U6.38 U9.9
NRF_INT: J3.3 U6.67 U9.6
NRF_LED: R34.1 U9.19
NRF_SWDCLK: R36.1 TC1.4 U9.24
NRF_SWDIO: J6.3 R35.1 TC1.2 U6.46 U9.23
RF233_!RST: J6.2 U2.8 U6.47
RF233_IRQ: J6.5 U2.24 U6.44
RF233_SLP: J6.1 U2.11 U6.48
SCK: J1.13 U2.19 U6.11
SPI_NCS0: J1.7 U6.4
SPI_NCS1: J1.5 U6.3
SPI_NCS2: J1.1 U6.1
SPI_NCS3: J1.3 U2.23 U6.2
SWDCLK/TCK: TC2.4 U6.18
SWDIO/TMS: TC2.2 U6.19
TRNG_EN: J3.5 R30.2 SJ6.1 U6.63 U12.4
TRNG_OUT: J3.4 U3.1 U6.64
TWI1_SCL: J1.4 J2.1 J2_3_5_AND_6.SCL R2.1 U6.21
TWI1_SDA: J1.2 J2.2 J2_3_5_AND_6.SDA R1.1 U6.20
TWI2_SCL: J2.7 R25.1 U6.92 U8.6 U9.4 U10.5 U11.4
TWI2_SDA: J2.8 R38.1 U6.91 U8.1 U9.3 U10.6 U11.6
USART0_CLK: J2_3_5_AND_6.D13 J2_3_5_AND_6.SCK U6.90
USART0_CTS: J2_3_5_AND_6.D9 U6.75
USART0_RTS: J2_3_5_AND_6.D10 U6.89
USART0_RX: J2.5 J2_3_5_AND_6.D12 J2_3_5_AND_6.MISO U6.93
USART0_TX: J2.6 J2_3_5_AND_6.D11 J2_3_5_AND_6.MOSI U6.94
USART2_CLK: J2.9 U6.76 U9.5
USART2_CTS: J5.4 U6.37 U9.10
USART2_RTS: J5.5 U6.36 U9.11
USART2_RX: J5.3 U6.40 U9.8
USART2_TX: J5.2 U6.41 U9.7
USART3_RTS: J6.4 U6.45 U7.19
USART3_RX: J2_3_5_AND_6.D0 J3.1 U6.73 U7.17
USART3_TX: J2.10 J2_3_5_AND_6.D1 U6.74 U7.1
USB_N: R28.2 U6.98
USB_P: R29.2 U6.99
USER_BTN: J1.10 R3.1 U6.79 USER.3 USER.4
USER_LED: J1.8 R24.1 U6.39
VCC_3V3 [power]: C16.1 C17.1 J2_3_5_AND_6.3.3V J2_3_5_AND_6.IOREF J4.1.2 J4.2.2 J4.3.1 J4.4.2 J4.5.2 R4.1 R5.1 R7.1 R21.1 SJ1.1 SJ2.1 SJ3.1 SJ4.1 SJ7.1 U5.5 U7.11 U7.12 U7.20
VCC_BAT [power]: BAT1.PWR@1 U1.2 U1.3
VCC_DBG_USB_5V [power]: D2.A USB2.VBUS
VCC_EXT_5V [power]: D9.A J2_3_5_AND_6.5V J2_3_5_AND_6.VCC J2_3_5_AND_6.VIN
VCC_IN [power]: C14.1 D2.C D3.C D9.C U1.13
VCC_LDO [power]: C8.1 R20.1 U1.10 U1.11 U5.1 U5.3
VCC_MCU_3V3 [power]: C15.2 C18.2 C19.2 C21.1 C22.2 C50.2 J4.3.2 L1.2 R1.2 R2.2 R3.2 R26.2 R33.2 SJ4.2 TC2.1 U6.8 U6.17 U6.57 U6.87 U6.88 U6.97
VCC_NRF_3V3 [power]: C31.1 C32.1 C33.1 C38.1 Q5.3 R35.2 R36.2 TC1.1 U9.1 U9.12 U9.35 U9.36
VCC_RF233_3V3 [power]: C5.1 C13.1 Q2.3 U2.15 U2.28
VCC_SENSE_3V3 [power]: C29.1 C40.1 C43.1 Q4.3 R25.2 R37.2 R38.2 U8.3 U8.4 U8.5 U10.1 U11.1 U11.14
VCC_TARGET_USB_5V [power]: D3.A USB1.VBUS
VCC_TRNG_3V3 [power]: C44.1 C48.1 L3.2 Q3.3 SJ6.2 U3.8 U12.5
VHIGH: C7.1 C11.1 C47.1 C49.+ D6.C R10.2 R11.2 R14.2 U4.8
VHIGHSAMPLE: R11.1 R12.2